# EAGLE board Pogopin Adapter (EAGLE 9.1.1)
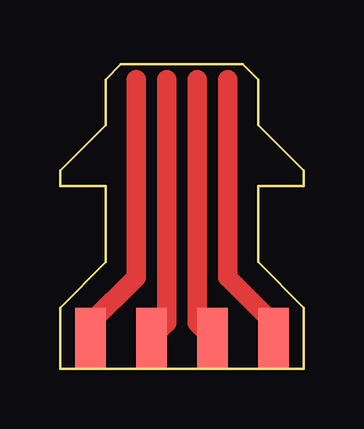
[diagram p0: board, top side]

Size 10.16 x 12.7 mm. Coordinates in mm from the lower left corner, seen from the top.
Outline: 0,0 10.16,0 10.16,2.54 8.26,4.45 8.26,7.62 10.16,7.62 10.16,8.26 8.26,10.16 8.26,12.06 7.62,12.7 2.54,12.7 1.91,12.06 1.91,10.16 0,8.26 0,7.62 1.91,7.62 1.91,4.45 0,2.54 0,0
Copper layers (1*16): Top 0.035mm / dielectric 1.5mm / Bottom 0.035mm
Design rules "default": minimum track width 6mil, minimum drill 0.35mm, track to track 6mil, track to pad 6mil, pad to pad 6mil, via to via 6mil, smd to smd 6mil, copper to edge 40mil, drill to drill 6mil, minimum pad ring 10mil, minimum via ring 8mil, stop-mask expansion 4mil, vias tented up to drill 0mil, thermal gap 10mil

## Footprints (pad centres in the part's own frame; a part is rotated, then mirrored left to right if it is on the bottom)
PAD-1.27X2.54 = smd 2.54 x 1.27: P$1 0,0

## Placement (x,y rotation side)
E$1  [PAD-1.27X2.54]  1.27,1.27 90 top
E$2  [PAD-1.27X2.54]  3.81,1.27 90 top
E$3  [PAD-1.27X2.54]  6.35,1.27 90 top
E$4  [PAD-1.27X2.54]  8.89,1.27 90 top

## Library data of the parts
E$1-E$4 = Flamberm

## Nets
S$1: E$1.P$1
S$2: E$2.P$1
S$3: E$3.P$1
S$4: E$4.P$1

## Tracks (layer width: path | path; a pad name or v marks a point on that pad's centre or on a via)
S$1
  Top 0.813: E$1.P$1 1.27,1.91 3.17,3.81 3.17,12.06
S$2
  Top 0.813: 4.45,12.06 4.45,1.91 E$2.P$1
S$3
  Top 0.813: E$3.P$1 5.71,1.91 5.71,12.06
S$4
  Top 0.813: E$4.P$1 8.89,1.91 6.99,3.81 6.99,12.06